# Altium PCB WashrPCBV1.PcbDoc
Units mm, origin at the board's own origin, x right, y up, seen from the top; angles counter-clockwise.
Board outline 82 x 52 mm, 2 copper layers (Top Layer, Bottom Layer); 37 components, 24 nets, 138 pads, 25 vias.
Unrouted connection lines stored in the file: 2.
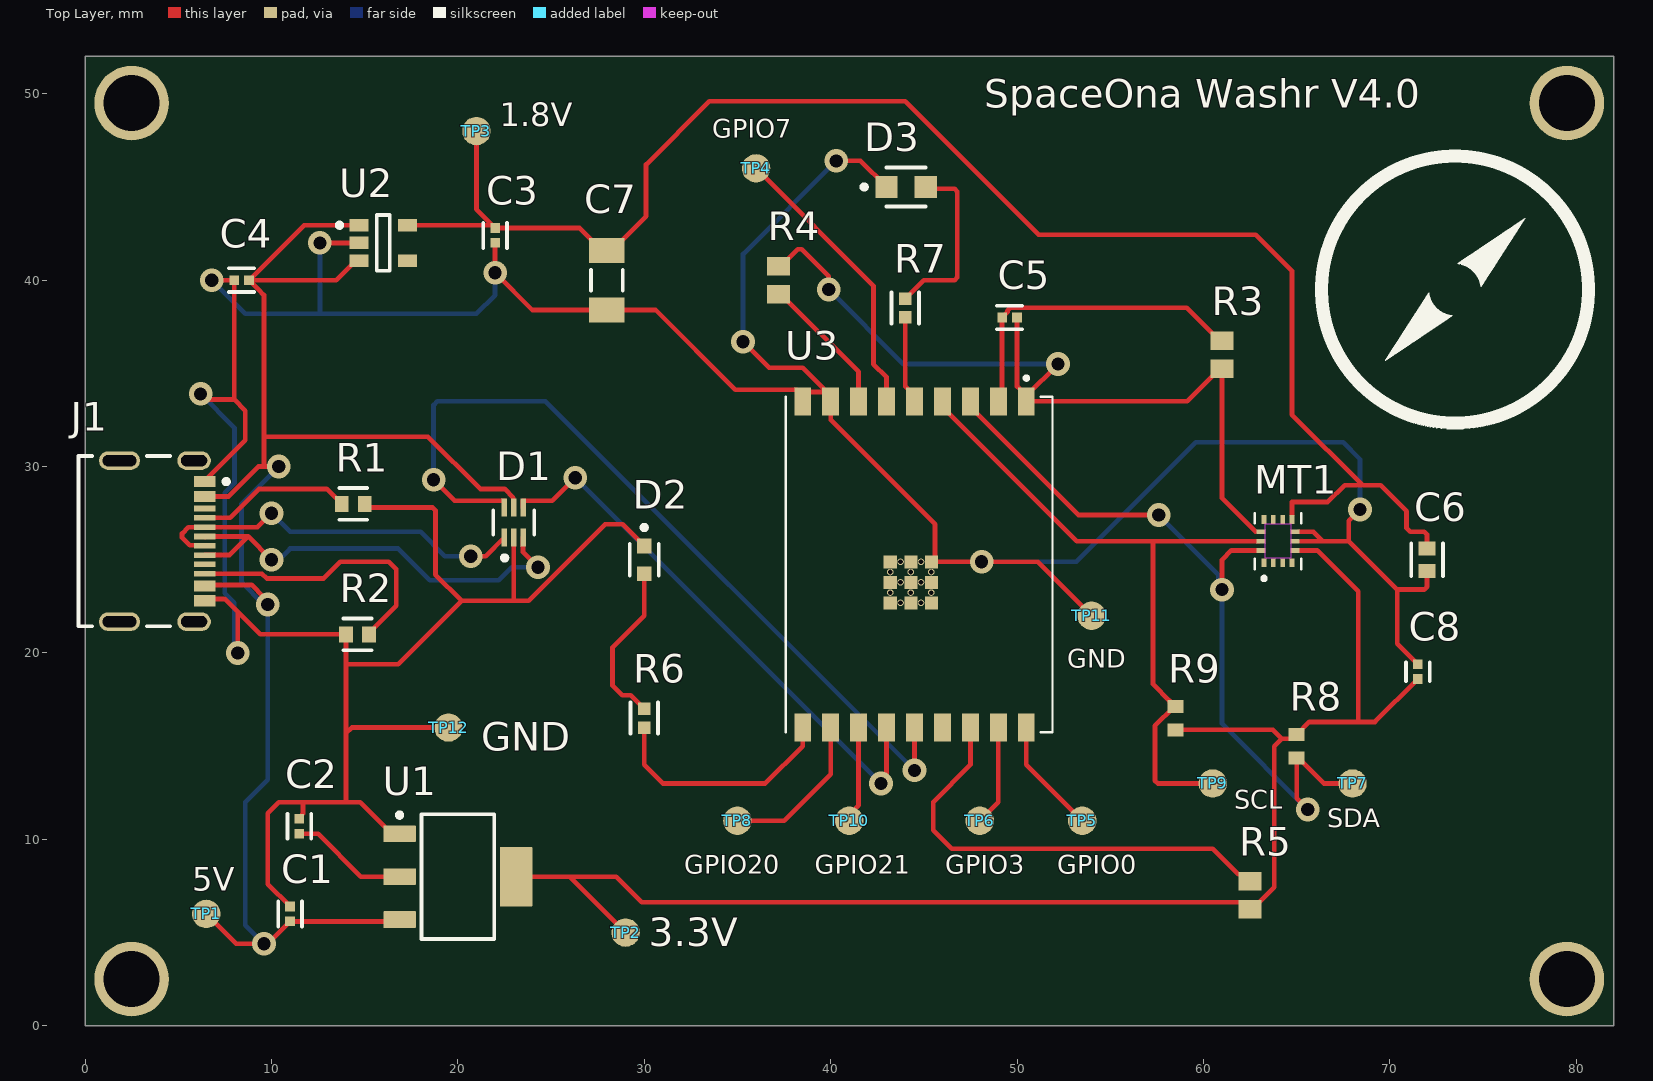
[diagram p0: Top Layer view]
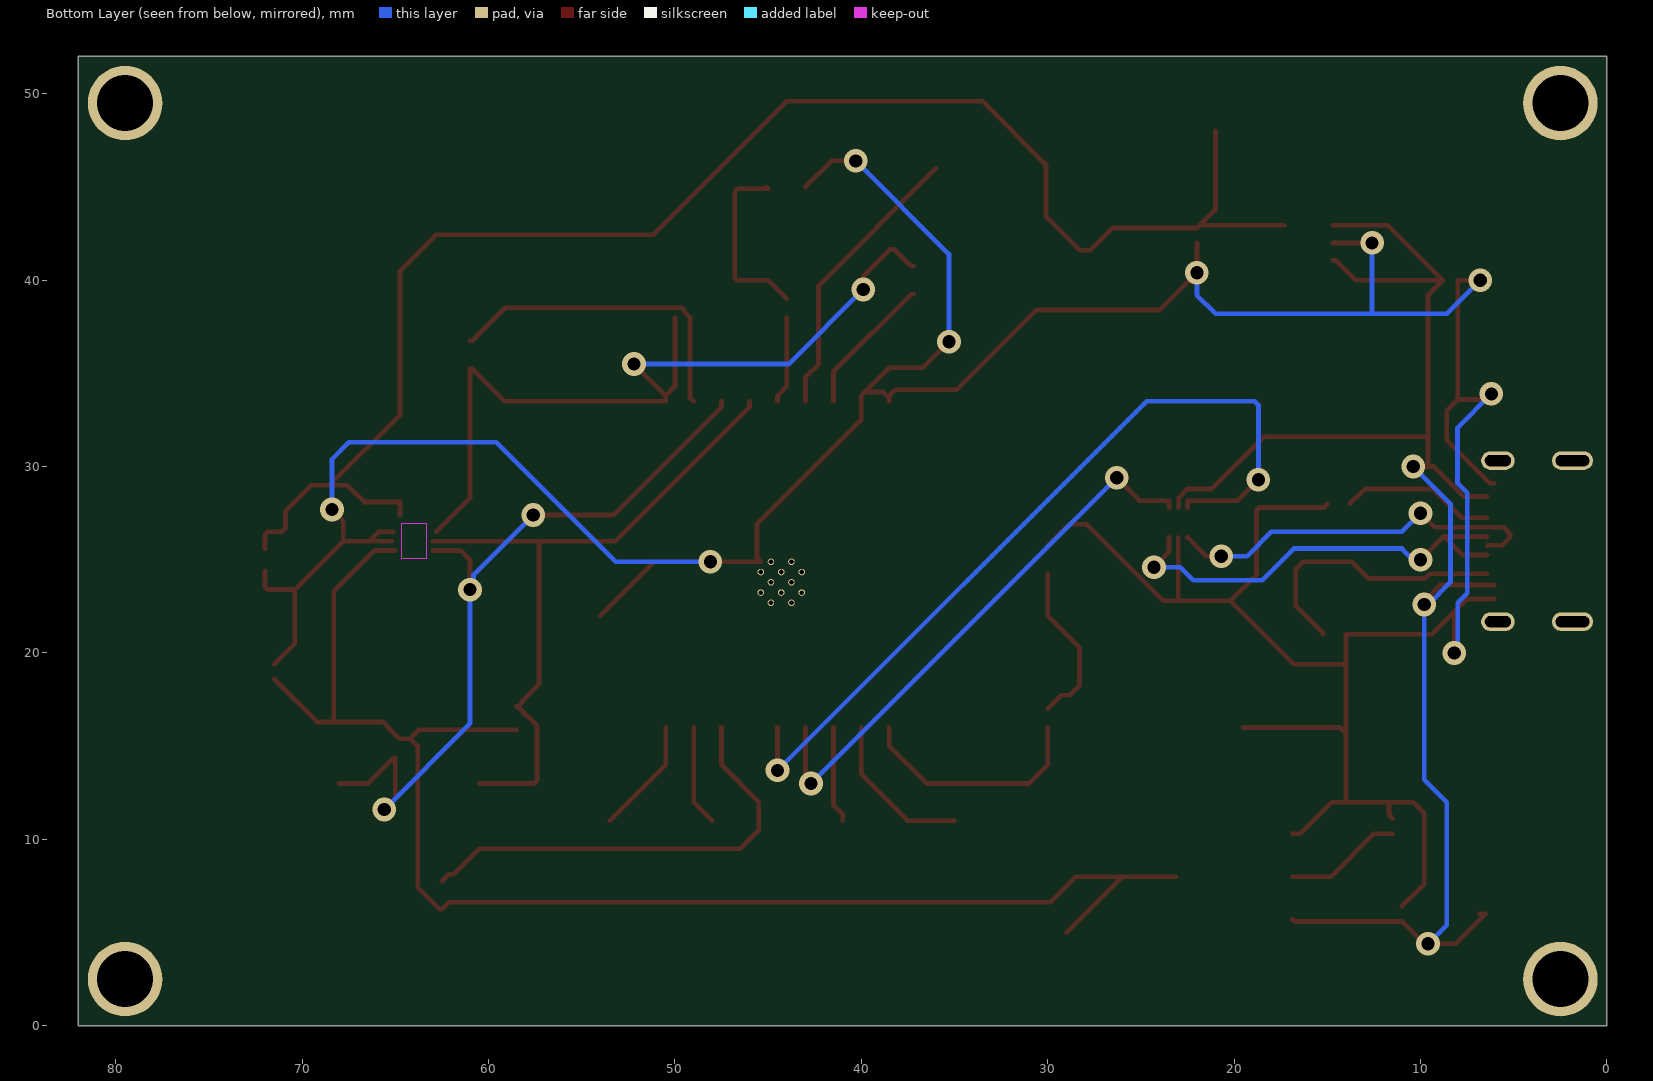
[diagram p1: Bottom Layer view, seen from below]
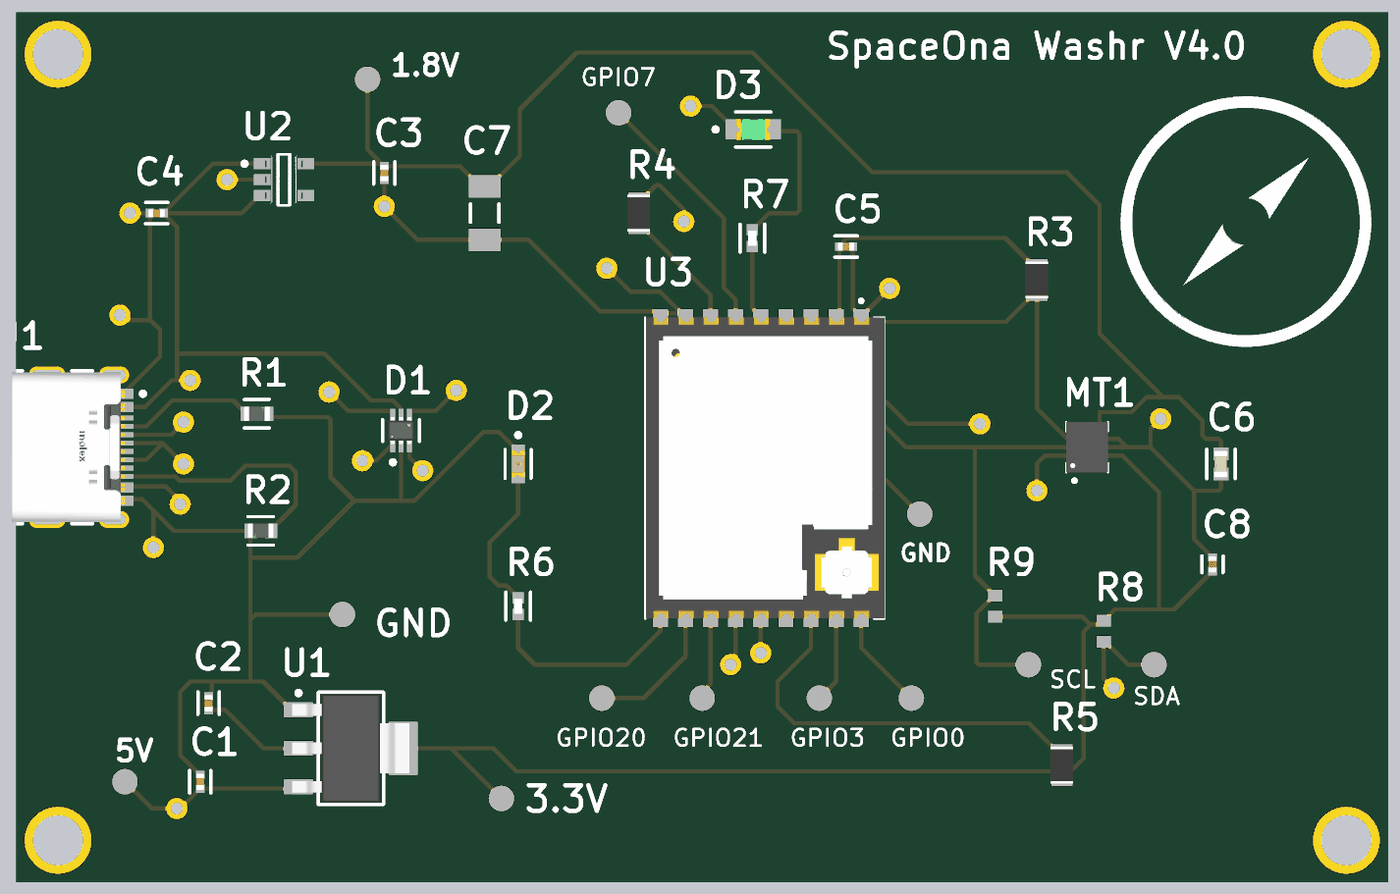
[diagram p2: 3D render of the assembled board from above, using the file's embedded part models]

## Layer stack, top to bottom
Top Solder: solder mask 0.0102, Solder Resist, Dk 3.5
Top Layer: signal copper 0.0356
Dielectric 1: dielectric 0.32, FR-4, Dk 4.8
Bottom Layer: signal copper 0.0356
Bottom Solder: solder mask 0.0102, Solder Resist, Dk 3.5

## Board outline
0,52 82,52 82,0 0,0

## Design rules (kind name [scope] priority, off if disabled: settings)
Clearance [All] p1: gap=0.127 ignorepadtopadclearanceinfootprint=FALSE
HoleSize [All] p1: absolutevalues=TRUE maxlimit=100 minlimit=1 maxpercent=80.000 minpercent=20.000
PolygonConnect [All] p1: connectstyle=Relief reliefconductorwidth=0.254 reliefentries=4 polygonreliefangle="90 Angle" airgapwidth=0.254
RoutingVias [All] p1: holewidth=0.4 width=0.6 viastyle="Through Hole" minholewidth=0.3 minwidth=0.5 maxholewidth=0.4 maxwidth=0.6
SolderMaskExpansion [All] p1: expansion=0.04 istentingtop=FALSE
Width [All] p1: maxlimit=0.254 minlimit=0.127 preferedwidth=0.254
29 further rules are at their usual default settings.

## Components (designator, comment, footprint, x,y, rotation, side; value= is the part's Value field where it differs from the comment)
C1 "C0402C105K8PACTU" FP-C0402C105K8PACTU-MFG 11,6 r90 top
C2 "C0402C105K8PACTU" FP-C0402C105K8PACTU-MFG 11.5,10.7 r90 top
C3 "C0402C105K8PACTU" FP-C0402C105K8PACTU-MFG 22,42.4 r270 top
C4 "C0402C105K8PACTU" FP-C0402C105K8PACTU-MFG 8.4,40 r180 top
C5 "C0402C105K8PACTU" FP-C0402C105K8PACTU-MFG 49.6,38 r180 top
C6 "C0603C104J5RACTU" FP-C0603C-CF-MFG 72,25 r90 top value="0.10 μF"
C7 "CAP 2.2uF 10V 1206(3216)" CAPC1206(3216)110_M 28,40 r90 top value=2.2uF
C8 "C0402C103J3RACTU" FP-C0402-BB-MFG 71.5,19 r90 top value="10,000 pF"
D1 "USBLC6-2P6" FP-SOT-666-MFG 23,27 r90 top
D2 "LTST-C191KRKT" FP-LTST-C191KRKT-MFG 30,25 r270 top
D3 "LTST-C171GKT" FP-LTST-C171GKT-MFG 44.05,45 r0 top
J1 "217179-0001" FP-2171790001-MFG 3,26 r270 top locked
MT1 "ICM-42670-P" XDCR_ICM-42670-P 64,26 r90 top
R1 "CRCW06035K10FKEA" FP-CRCW0603-e3-IPC_C 14.385,28 r0 top
R2 "CRCW06035K10FKEA" FP-CRCW0603-e3-IPC_C 14.615,21 r180 top
R3 "ERA-6AEB103V" RESC2013X60X40LL20T25_A 61,36 r90 top
R4 "ERA-6AEB103V" RESC2013X60X40LL20T25_A 37.2,40 r90 top
R5 "ERA-6AEB103V" RESC2013X60X40LL20T25_A 62.5,7 r270 top
R6 "CRCW040282R0JNED" FP-CRCW0402-e3-IPC_A 30,16.502 r270 top
R7 "CRCW040282R0JNED" FP-CRCW0402-e3-IPC_A 44,38.502 r270 top
R8 "ERJ-3GEYJ472V" RESC1608X55X30LL15T15 65,15 r90 top
R9 "ERJ-3GEYJ472V" RESC1608X55X30LL15T15 58.5,16.5 r270 top
TP1 "Testpin" PCBComponent_1 6.5,6 r90 top
TP2 "Testpin" PCBComponent_1 29,5 r90 top
TP3 "Testpin" PCBComponent_1 21,48 r90 top
TP4 "Testpin" PCBComponent_1 36,46 r90 top
TP5 "Testpin" PCBComponent_1 53.5,11 r90 top
TP6 "Testpin" PCBComponent_1 48,11 r90 top
TP7 "Testpin" PCBComponent_1 68,13 r90 top
TP8 "Testpin" PCBComponent_1 35,11 r90 top
TP9 "Testpin" PCBComponent_1 60.5,13 r90 top
TP10 "Testpin" PCBComponent_1 41,11 r90 top
TP11 "Testpin" PCBComponent_1 54,22 r90 top
TP12 "Testpin" PCBComponent_1 19.5,16 r90 top
U1 "TLV1117LV33DCYR" DCY0004A_N 20,8 r0 top locked
U2 "MIC5504-1.8YM5-TR" FP-SOT23-5LD-PL-1-MFG 16,42 r0 top
U3 "ESP32-C3-WROOM-02U-N4" XCVR_ESP32-C3-WROOM-02U-N4 44.75,24.75 r270 top

## Footprints (in the part's own frame and the unit in brackets; to place one, negate y for a bottom-side part, rotate by r counter-clockwise, add the part's x,y. Pads: shape width x height; smd on the part's side, far side on the other; paste and mask are expansions set on the pad)
CAPC1206(3216)110_M [mm] "Chip Capacitor, Body 3.2x1.6mm, Height 1.1mm, IPC Low Density"
  rect 1.35x1.9 smd: 1(-1.6,0) 2(1.6,0)
  silkscreen extent -0.55,-0.85 0.55,0.85, body extent -1.7,-0.9 1.7,0.9, height 1.1
DCY0004A_N [mm] "SOT223, 4-Leads, Body 6.7x3.7mm, Pitch 2.3mm, IPC Medium Density"
  rrect11% 1.75x0.9 smd: 1(-3.125,2.3) 2(-3.125,0) 3(-3.125,-2.3)
  rrect6% 1.75x3.2 smd: 4(3.125,0)
  silkscreen extent -3.25,-3.35 1.95,3.42, body extent -3.5,-3.25 3.5,3.25, height 1.62
FP-2171790001-MFG [mm]
  rrect100% 1x1.8 hole 1.4 slot 0.6 at 0 deg paste-2539.97 mask+0: 1(-4.32,2.85) 2(4.32,2.85)
  rrect100% 1x2.2 hole 1.8 slot 0.6 at 0 deg paste-2539.97 mask+0: 3(-4.32,-1.15) 4(4.32,-1.15)
  rect 0.6x1.15 smd paste+0 mask+0: A1-B12(-3.2,3.425) A4-B9(-2.4,3.425) B1-A12(3.2,3.425) B4-A9(2.4,3.425)
  rect 0.3x1.15 smd paste+0 mask+0: A5(-1.25,3.425) A6(-0.25,3.425) A7(0.25,3.425) A8(1.25,3.425) B5(1.75,3.425) B6(0.75,3.425) B7(-0.75,3.425) B8(-1.75,3.425)
  silkscreen extent -4.57,-3.35 4.57,4.7, body extent -4.92,-3.45 4.92,4.1, height 0.25
FP-C0402-BB-MFG [mm]
  rect 0.52x0.52 smd paste+0 mask+0: 1(-0.4,0) 2(0.4,0)
  silkscreen extent -0.5,-0.64 0.5,0.64, body extent -0.8,-0.4 0.8,0.4, height 0.25
FP-C0402C105K8PACTU-MFG [mm]
  rect 0.52x0.52 smd paste+0 mask+0: 1(-0.4,0) 2(0.4,0)
  silkscreen extent -0.67,-0.64 0.67,0.64, body extent -0.8,-0.4 0.8,0.4, height 0.25
FP-C0603C-CF-MFG [mm]
  rect 0.75x0.9 smd paste+0 mask+0: 1(-0.6,0) 2(0.6,0)
  silkscreen extent -0.87,-0.85 0.88,0.85, body extent -1.2,-0.6 1.2,0.6, height 0.25
FP-CRCW0402-e3-IPC_A [mm]
  rect 0.668x0.672 smd paste+0 mask+0: 1(-0.502,0) 2(0.502,0)
  silkscreen extent -0.84,-0.74 0.84,0.74, body extent -1.04,-0.54 1.04,0.54, height 0.25
FP-CRCW0603-e3-IPC_C [mm]
  rect 0.735x0.862 smd paste+0 mask+0: 1(-0.615,0) 2(0.615,0)
  silkscreen extent -0.75,-0.85 0.75,0.85, body extent -1.08,-0.58 1.08,0.58, height 0.25
FP-LTST-C171GKT-MFG [mm]
  rect 1.2x1.2 smd paste+0 mask+0: 1(-1.05,0) 2(1.05,0)
  silkscreen extent -2.37,-1.05 1.05,1.05, body extent -1.75,-0.77 1.75,0.77, height 0.25
FP-LTST-C191KRKT-MFG [mm]
  rect 0.8x0.8 smd paste+0 mask+0: 1(-0.75,0) 2(0.75,0)
  silkscreen extent -1.86,-0.78 0.86,0.78, body extent -1.25,-0.55 1.25,0.55, height 0.25
FP-SOT23-5LD-PL-1-MFG [mm]
  rect 1x0.66 smd paste+0 mask+0: 1(-1.3,0.95) 2(-1.3,0) 3(-1.3,-0.95) 4(1.3,-0.95) 5(1.3,0.95)
  silkscreen extent -2.47,-1.5 0.35,1.5, body extent -1.9,-1.6 1.9,1.6, height 0.25
FP-SOT-666-MFG [mm]
  rect 0.99x0.3 smd paste+0 mask+0: 1(-0.805,0.5) 2(-0.805,0) 3(-0.805,-0.5) 4(0.805,-0.5) 5(0.805,0) 6(0.805,0.5)
  silkscreen extent -2.02,-1.1 0.65,1.1, body extent -1.4,-0.95 1.4,0.95, height 0.25
PCBComponent_1 [mil]
  round 60 smd: 1(0,0)
RESC1608X55X30LL15T15 [mm] "Chip Resistor, 2-Leads, Body 1.60x0.80mm, IPC High Density"
  rect 0.7x0.85 smd: 1(-0.625,0) 2(0.625,0)
  body extent -0.87,-0.48 0.87,0.48, height 0.55
RESC2013X60X40LL20T25_A [mm] "Chip Resistor, 2-Leads, Body 2.20x1.35mm, IPC High Density"
  rect 1x1.25 smd: 1(-0.75,0) 2(0.75,0)
  body extent -1.1,-0.67 1.1,0.67, height 0.6
XCVR_ESP32-C3-WROOM-02U-N4 [mm]
  rect 1.5x0.9 smd: 1(-8.75,5.75) 2(-8.75,4.25) 3(-8.75,2.75) 4(-8.75,1.25) 5(-8.75,-0.25) 6(-8.75,-1.75) 7(-8.75,-3.25) 8(-8.75,-4.75) 9(-8.75,-6.25) 10(8.75,-6.25) 11(8.75,-4.75) 12(8.75,-3.25) 13(8.75,-1.75) 14(8.75,-0.25) 15(8.75,1.25) 16(8.75,2.75) 17(8.75,4.25) 18(8.75,5.75)
  rect 0.7x0.7 smd: 19_1(-0.14,0.65) 19_2(0.96,0.65) 19_3(2.06,0.65) 19_4(-0.14,-0.45) 19_5(0.96,-0.45) 19_6(2.06,-0.45) 19_7(-0.14,-1.55) 19_8(0.96,-1.55) 19_9(2.06,-1.55)
  round 0.35 hole 0.25 mask+0: 20_1(0.41,0.65) 20_2(1.51,0.65) 20_3(-0.14,0.1) 20_4(0.96,0.1) 20_5(2.06,0.1) 20_6(0.41,-0.45) 20_7(1.51,-0.45) 20_8(-0.14,-1) 20_9(0.96,-1) 20_10(2.06,-1) 20_11(0.41,-1.55) 20_12(1.51,-1.55)
  silkscreen extent -10.1,-7.15 9,7.15, body extent -9.02,-7.11 8.98,7.19, height 3.2
XDCR_ICM-42670-P [mm]
  rect 0.475x0.25 smd paste-1 mask+0.05: 1(-1.162,0.75) 2(-1.162,0.25) 3(-1.162,-0.25) 4(-1.162,-0.75) 8(1.162,-0.75) 9(1.162,-0.25) 10(1.162,0.25) 11(1.162,0.75)
  rect 0.25x0.475 smd paste-1 mask+0.05: 5(-0.5,-0.913) 6(0,-0.913) 7(0.5,-0.913) 12(0.5,0.913) 13(0,0.913) 14(-0.5,0.913)
  Keep-Out Layer region: 0.925,-0.675 -0.925,-0.675 -0.925,0.675 0.925,0.675
  silkscreen extent -2.1,-1.25 1.5,1.25, body extent -1.5,-1.25 1.5,1.25, height 0.81

## Part data
C1 C2 C3 C4 C5: library part CMP-2008-02081-2, "CAP CER 1UF 10V X5R 0402", Capacitance=1uF, Case Code (Imperial)=0402, Case Code (Metric)=1005, Dielectric=X5R, Dielectric Material=Ceramic, Max Operating Temperature=85°C, Min Operating Temperature=-55°C, Package Quantity=1, Tolerance=10%, Voltage=10V, Case/Package=0402, Construction=Flat, Contact Plating=Tin, Depth=0.5mm, Dissipation Factor=5%, Height=0.5mm, Lead Free="Lead Free", Length=1mm, Mount="Surface Mount", Number of Pins=2, Packaging="Tape and Reel", Radiation Hardening=No, REACH SVHC="No SVHC", RoHS Compliant=Yes, Series=C, Termination=SMD/SMT, Thickness=0.022inch, Voltage Rating=10V, Voltage Rating (DC)=10V, Width=0.5mm
C6: library part CMP-2006-03056-2, "CAP CER 0.1UF 50V 5% X7R 0603", Capacitance="0.10 μF", Manufacturer=KEMET, Package=C0603C-CF, Temperature="-55°C to +125°C", Temperature Characteristic=X7R, Temperature Coefficient=30ppm/°C, Temperature Range High=+125°C, Temperature Range Low=-55°C, Tolerance=0.05, Voltage Rating="50 V", Automotive=Yes, Automotive Grade="Grade 1", Category=Cap, ComponentLink2Description=Datasheet, ComponentLink2URL=https://api.kemet.com/component-edge/download/datasheet/C0603C100J5GACAUTO.pdf, Device Class L1="Passive Components", Device Class L2=Capacitors, Device Class L3="Ceramic Capacitors", Digikey Description="CAP CER 0.1UF 50V 5% X7R 0603", Height=0.87mm, Lead Free=Yes, Manufacturer Part Number=C0603C104J5RACTU, Material=Ceramic, Mouser Description="Multilayer Ceramic Capacitors MLCC - SMD/SMT 50volts 0.1uF X7R 5%", Octopart=https://octopart.com/c0603c104j5ractu-kemet-10440638, RoHS=TRUE
C7: library part CMP-1037-04796-1, "CAP 2.2uF 10V ±10% 1206 (3216 Metric) Thickness 1.1mm SMD", Case-EIA=1206, Case-Metric=3216, Rated Voltage="10 V", Tolerance=Â±10%, Max Thickness="1.1 mm", Technology=SMT
C8: library part CMP-2008-03065-2, "CAP CER 10000PF 25V X7R 0402", Capacitance="10,000 pF", Manufacturer=Kemet, Package=C0402-BB, Temperature="-55°C to +125°C", Temperature Characteristic=X7R, Temperature Coefficient=15%, Temperature Range High=+125°C, Temperature Range Low=-55°C, Tolerance=0.05, Voltage Rating="25 V", Automotive=No, Category=Cap, ComponentLink2Description=Datasheet, ComponentLink2URL=https://content.kemet.com/datasheets/KEM_C1002_X7R_SMD.pdf, Device Class L1="Passive Components", Device Class L2=Capacitors, Device Class L3="Ceramic Capacitors", Digikey Description="CAP CER 10000PF 25V X7R 0402", Height=0.55mm, Ipc Land Pattern Name=CAPC10050X50, Lead Free=Yes, Manufacturer Part Number=C0402C103J3RACTU, Material=Ceramic, Mouser Description="Multilayer Ceramic Capacitors MLCC - SMD/SMT 25volts 10000pF X7R 5%", Octopart=https://octopart.com/c0402c103j3ractu-kemet-135051, RoHS=TRUE
D1: library part CMP-12225-000058-1, "TVS DIODE 5.25V 17V SOT666", Breakdown Voltage=6V, Capacitance=3.5pF, Case/Package=SOT-666, Clamping Voltage=17V, Leakage Current=150nA, Max Operating Temperature=125°C, Min Operating Temperature=-40°C, Operating Supply Voltage=5V, Package Quantity=1, Peak Pulse Current=5A, Power Line Protection=Yes, Test Current=1mA, Contact Plating=Tin, Depth=1.3mm, Direction=Unidirectional, Element Configuration=Dual, ESD Protection=Yes, Height=0.6mm, Lead Free="Lead Free", Length=1.7mm, Max Breakdown Voltage=6V, Max Reverse Leakage Current=150nA, Min Breakdown Voltage=6V, Mount="Surface Mount", Number of Bidirectional Channels=2, Number of Channels=2, Number of Elements=1, Number of Pins=6, Packaging="Tape and Reel", Polarity=Unidirectional, Radiation Hardening=No, REACH SVHC="No SVHC", Reverse Breakdown Voltage=6V, Reverse Standoff Voltage=5V, Termination=SMD/SMT, Width=1.3mm, Working Voltage=5V
D2: library part CMP-2000-05199-2, Case Code (Imperial)=0603, Case Code (Metric)=1608, Color=Red, Current=2A, Forward Current=20mA, Forward Voltage=2V, Lens Color=Colorless, Max Operating Temperature=85°C, Min Operating Temperature=-55°C, Power Dissipation=75mW, Reverse Voltage=5V, Case/Package=0603, Depth=800µm, Dominant Wavelength=631nm, Height=550µm, Illumination Color=Red, Lead Free="Lead Free", Length=1.6mm, Lens Style=Clear, Lens Transparency=Clear, Luminous Intensity=54mcd, Mount="Surface Mount", NexarPartId=549908, Number of Elements=1, Number of LEDs=1, Number of Pins=2, Packaging="Tape and Reel", Power Rating=75mW, Radiation Hardening=No, RoHS=Compliant, Schedule B="8541402000, 8541402000", Test Current=20mA, Viewing Angle=130°, Voltage=2V, Wavelength=639nm, Width=800µm
D3: library part CMP-22017-000007-1, "LED GREEN CLEAR CHIP SMD", Case Code (Imperial)=0805, Case Code (Metric)=2012, Color=Green, Forward Current=30mA, Forward Voltage=2.1V, Lens Color=Colorless, Max Operating Temperature=85°C, Min Operating Temperature=-55°C, Package Quantity=1, Power Dissipation=100mW, Reverse Voltage=5V, Test Current=10mA, Case/Package=0805, Depth=1.25mm, Dominant Wavelength=569nm, Height=0.8mm, Illumination Color=Green, Lead Free="Lead Free", Length=2mm, Lens Style=Diffused, Lens Transparency=Clear, Luminous Intensity=12mcd, Mount="Surface Mount", Number of Elements=1, Number of LEDs=1, Number of Pins=2, Packaging="Tape and Reel", Power Rating=100mW, Radiation Hardening=No, Viewing Angle=130°, Wavelength=585nm, Width=1.25mm
J1: library part CMP-04767-000028-2, "CONN RCP USB2.0 TYP C 24P SMD RA", Current Rating=1.25A, Max Operating Temperature=85°C, Min Operating Temperature=-40°C, Voltage Rating=30V, Contact Material="Gold, Nickel", Gender=Receptacle, Height=3.36mm, NexarPartId=117190526, Number of Contacts=16, USB Standard="USB 2.0"
MT1: Package=None, Supplier Part Number 1=410-ICM-42670-P, Availability=Unavailable, MP=ICM-42670-P, Price=None, Supplier 1=Mouser
R1 R2: library part CMP-1012-00590-3, "RES Thick Film, 5.1kΩ, 1%, 0.1W, 100ppm/°C, 0603", Case Code (Imperial)=0603, Case Code (Metric)=1608, Max Operating Temperature=155°C, Min Operating Temperature=-55°C, Package Quantity=5000, Power Rating=100mW, Resistance=5.1kR, Temperature Coefficient=100ppm/°C, Tolerance=1%, Voltage Rating=75V, Case/Package=0603, Composition="Thick Film", Contact Plating=Tin, Depth=0.85mm, Height=0.45mm, Lead Free="Lead Free", Length=1.55mm, Military Standard=Not, Mount="Surface Mount", Packaging="Tape and Reel", Radiation Hardening=No, Termination=SMD/SMT, Voltage Rating (DC)=75V, Weight=7.1E-05oz, Width=0.85mm
R3 R4 R5: library part CMP-2001-00582-2, "Metal Film Chip Resistor, High Reliability Type, 0.125 W, +/- 0.1%, -55 to 155 degC, 0805 (2012 Metric), RoHS, Tape and Reel", Case Code - in=0805, Case Code - mm=2012, Manufacturer=Panasonic, Operating Temperature Range=-55Cto+155C, Package / Case=0805(2012metric), Package Description="2-Pin Surface Mount Device, Body 2 x 1.25 mm", Power Rating=125mW(1/8W), Resistance=10kOhms, Temperature Coefficient=25PPM/C, Tolerance=0.1%, Voltage Rating=100V, Brand=Panasonic, Datasheet URL=https://industrial.panasonic.com/cdbs/www-data/pdf/RDM0000/AOA0000C307.pdf, Datasheet Version=02/2016, Factory Pack Quantity=5000, Height=0.5mm, Length=2mm, Manufacturer URL=http://www.panasonic.com/, Mounting Technology=SurfaceMount, Package Reference=0805, Packaging=Reel, Product=ThinFilmResistorsSMD, Product Category=ThinFilmResistors-SMD, RoHS=Details, Series=ERA-6A, Termination Style=SMD/SMT, Type=MetalFilmChipResistors, Width=1.25mm
R6 R7: library part CMP-2002-00239-2, "RES Thick Film, 82Ω, 5%, 0.063W, 200ppm/°C, 0402", Case Code (Imperial)=0402, Case Code (Metric)=1005, Max Operating Temperature=155°C, Max Power Dissipation=63mW, Min Operating Temperature=-55°C, Package Quantity=1, Resistance=82R, Temperature Coefficient=200ppm/°C, Tolerance=5%, Voltage Rating=50V, Case/Package=0402, Composition="Thick Film", Contact Plating=Tin, Depth=0.5mm, Features="Automotive AEC-Q200", Height=0.016inch, Lead Free="Lead Free", Length=1mm, Military Standard=Not, Number of Pins=2, Number of Terminations=2, Packaging="Tape and Reel", Power Rating=63mW, Radiation Hardening=No, Termination=SMD/SMT, Voltage Rating (DC)=50V, Weight=2.3E-05oz, Width=0.5mm
R8 R9: library part CMP-2000-00796-1, Manufacturer=Panasonic, Part Number=ERJ-3GEYJ472V
TP1 TP2 TP3 TP4 TP5 TP6 TP7 TP8 TP9 TP10 TP11 TP12: library part Testpin1
U1: library part CMP-0395-00503-2, "Single Output LDO, 1 A, Fixed 3.3 V Output, 2 to 5.5 V Input, 4-pin SOT-223 (DCY), -40 to 125 degC, Green (RoHS & no Sb/Br)", Manufacturer="Texas Instruments", Accuracy(%)=2, Code_JEDEC=TO-261, ComponentLink1Description="Manufacturer URL", ComponentLink1URL=http://www.ti.com/, ComponentLink2Description=Datasheet, ComponentLink2URL=http://www.ti.com/general/docs/lit/getliterature.tsp?genericPartNumber=TLV1117LV33&fileType=pdf, ComponentLink3Description="Package Specification", ComponentLink3URL=http://www.ti.com/litv/pdf/mpds094a, DatasheetVersion=SBVS160A, Eco-Plan="Green (RoHS & no Sb/Br)", Fixed Output Options(V)=3.3, Iout(Max)(A)=1, Iq(Typ)(mA)=0.05, Mounting Technology="Surface Mount", PackageDescription="4-Pin Plastic Small Outline, Body 3.5 x 6.5 mm, Pitch 2.3 mm", PackageReference=DCY0004A, PackageVersion=4202506/B, PartNumber=TLV1117LV33DCYR, SubFamily="Single Channel LDO", Vdo(Typ)(mV)=1200, Vin(Max)(V)=5.5, Vin(Min)(V)=2, Vout Adj(Max)(V)=3.3, Vout Adj(Min)(V)=3.3
U2: library part CMP-06324-000021-1, "IC REG LINEAR 1.8V 300MA SOT23-5", Dropout Voltage=160mV, Manufacturer=Microchip, Max Junction Temp=+125°C, Max Supply Voltage=5.5V, Min Supply Voltage=2.5V, Nominal Supply Current=38-42uA, Output Current=300mA, Output Voltage=1.8V, Package=SOT23-5LD-PL-1, Temperature="-40°C to +125°C", Temperature Range Low=-40°C, Accuracy Percentage=2%, Automotive=No, Category=IC, ComponentLink2Description=Datasheet, ComponentLink2URL=http://ww1.microchip.com/downloads/en/DeviceDoc/MIC5501-02-03-04-300mA-Single-Output-LDO-in-Small-Packages-DS20006006B.pdf, Device Class L1="Integrated Circuits (ICs)", Device Class L2="Power Management ICs", Device Class L3="Voltage Regulators - Linear", Digikey Description="IC REG LINEAR 1.8V 300MA SOT23-5", Height=1.45mm, Lead Free=Yes, Manufacturer Part Number=MIC5504-1.8YM5-TR, Number Of Outputs=1, Octopart=https://octopart.com/mic5504-1.8ym5-tr-microchip-66803399, Output Type=Fixed, RoHS=TRUE, Standoff Height=0mm, Temperature Range High=+125°C
U3: "Bluetooth, WiFi 802.11b/g/n, Bluetooth v5.0 Transceiver Module 2.4GHz Antenna Not Included, U.FL Surface Mount", Package="SMD-19 Espressif Systems", Check_prices=https://www.snapeda.com/parts/ESP32-C3-WROOM-02U-N4/Espressif+Systems/view-part/?ref=eda, MF="Espressif Systems", MP=ESP32-C3-WROOM-02U-N4, SnapEDA_Link=https://www.snapeda.com/parts/ESP32-C3-WROOM-02U-N4/Espressif+Systems/view-part/?ref=snap

## Free pads (board coordinates)
  round 4 hole 3: 6(2.5,2.5) 6(2.5,49.5) 6(79.5,2.5) 6(79.5,49.5)

## Via types
v1: diameter 1.27, hole 0.711, Top Layer to Bottom Layer, 25 vias

## Nets (pads, with @x,y where several pads share a name; then routed paths per layer and width w, separated by ;. In a path a pad name is that pad's centre, name@x,y a point inside that pad or via, vN(x,y) a via of type N, cw(c..) or ccw(c..) an arc to the next point about the centre after c; other vN are vias at no path point)
CC1: J1.A5 R1.1 | length 8.4
  Top Layer w0.254: J1.A5 7.787,27.25 9.337,28.8 12.969,28.8 13.465,28.304 13.529,28.304 13.769,28.064 R1.1
CC2: J1.B5 R2.1 | length 15
  Top Layer w0.254: J1.B5 9.493,24.25 9.743,24 12.8,24 13.7,24.9 16.3,24.9 16.7,24.5 16.7,22.533 15.231,21.064 R2.1
D+: D1.4 U3.13 | length 30
  Top Layer w0.254: D1.4 23.5,28.15 23.523,28.173 25.073,28.173 v1(26.3,29.4) ; v1(42.7,13) 42.7,13.1 43,13.4 U3.13
  Bottom Layer w0.254: v1(26.3,29.4) v1(42.7,13)
D-: D1.6 U3.14 | length 45
  Top Layer w0.254: v1(18.7,29.3) 19.827,28.173 22.477,28.173 22.5,28.15 D1.6 ; v1(44.5,13.7) U3.14
  Bottom Layer w0.254: v1(18.7,29.3) 18.7,33.3 18.9,33.5 24.7,33.5 v1(44.5,13.7)
D_N: D1.1 J1.A7 J1.B7 | length 20.7
  Top Layer w0.254: J1.A7 6.402,25.773 5.627,25.773 5.205,26.195 5.205,26.405 5.55,26.75 J1.B7 9.25,26.75 v1(10,27.5) ; v1(20.694,25.194) 21.499,25.194 D1.1
  Bottom Layer w0.254: v1(10,27.5) 11,26.5 18,26.5 19.306,25.194 v1(20.694,25.194)
D_P: D1.3 J1.A6 J1.B6 | length 23.9
  Top Layer w0.254: J1.B6 7.75,25.25 8.75,26.25 ; J1.A6@6.448,26.227 J1.A6 8.75,26.25 ; v1(10,25) 8.75,26.25 ; D1.3 23.5,25.4 v1(24.3,24.6)
  Bottom Layer w0.254: v1@10.411,25.011 11,25.6 16.8,25.6 18.5,23.9 22.2,23.9 22.9,24.6 v1(24.3,24.6)
GND: C1.2 C2.2 C3.2 C4.2 C6.1 C7.1 C8.2 D1.2 D2.1 D3.1 J1.A1-B12 J1.B1-A12 MT1.6 MT1.7 R1.2 R2.2 TP11.1 TP12.1 U1.1 U2.2 U3.8 U3.9 U3.19_1 | length 233.8
  Top Layer w0.254: J1.B1-A12@6.05,22.9 7.5,22.9 8.2,22.2 ; J1.A1-B12@6.05,29.1 6.29,29.1 8.6,31.41 8.6,33 8,33.6 ; v1(6.2,33.9) 6.5,33.6 8,33.6 ; v1(6.8,40) C4.2 8,33.6 ; v1(8.2,20) 8.2,22.2 ; C1.2 9.8,7.6 9.8,11.4 10.395,11.995 11.693,11.995 ; C2.2 11.633,11.233 11.633,11.322 11.693,11.382 11.693,11.995 ; v1(12.6,42) U2.2 ; R1.2 15.2,27.8 18.651,27.8 18.8,27.651 18.8,24.2 20.2,22.8 ; U1.1 16.45,10.3 14.755,11.995 14,11.995 ; TP12.1 14.303,16 14,15.697 ; C3.2 v1(22,40.4) 24,38.4 C7.1 30.616,38.4 34.893,34.123 38.177,34.123 38.5,33.8 U3.9@38.5,33.677 ; D1.2 23,22.8 ; D2.1 28.85,26.9 27.9,26.9 23.8,22.8 23,22.8 ; v1(35.3,36.7) 36.7,35.3 38.5,35.3 40,33.8 U3.8 40,32.5 45.6,26.9 45.6,25.09 U3.19_1 45.405,24.895 48.095,24.895 v1(48.1,24.9) 51.1,24.9 TP11.1 ; U3.9 U3.9@38.5,33.677 ; U3.8@39.677,34 38.823,34 U3.9@38.5,33.677 ; v1(40.3,46.4) 41.6,46.4 D3.1 ; MT1.7@65.1,26.5 65.9,26.5 66.4,26 ; 65.2,26 66.4,26 ; v1(68.4,27.7) 67.8,27.1 67.8,26 ; C8.2 70.4,20.5 70.4,23.4 ; C6.1 72,23.549 71.851,23.4 70.4,23.4 ; 8.2,22.2 9.4,21 R2.2 14,19.4 ; 11.693,11.995 14,11.995 ; 14,11.995 14,15.697 ; 14,15.697 14,19.4 ; 14,19.4 16.8,19.4 20.2,22.8 ; 20.2,22.8 23,22.8 ; 66.4,26 67.8,26 ; 67.8,26 70.4,23.4
  Bottom Layer w0.254: v1(6.2,33.9) 8.019,32.081 8.019,29.106 7.5,28.587 7.5,23.2 8.01,22.691 8.01,20.19 v1(8.2,20) ; v1(6.8,40) 8.6,38.2 12.6,38.2 ; v1(12.6,42) 12.6,38.2 ; v1(22,40.4) 22,39.2 21,38.2 12.6,38.2 ; v1(35.3,36.7) 35.3,41.4 v1(40.3,46.4) ; v1(48.1,24.9) 48.11,24.89 53.19,24.89 59.6,31.3 67.5,31.3 68.4,30.4 v1(68.4,27.7)
NetC5_2: C5.2 R3.2 U3.2 | length 17.4
  Top Layer w0.254: U3.2 49.2,33.7 C5.2 49.486,38.286 49.486,38.365 49.635,38.514 59.111,38.514 60.875,36.75 R3.2
NetD2_2: D2.2 R6.1 | length 8.9
  Top Layer w0.254: R6.1 29.998,17.004 29.272,17.73 28.819,17.73 28.3,18.249 28.3,20.3 30,22 D2.2
NetD3_2: D3.2 R7.1 | length 9.9
  Top Layer w0.254: R7.1 44.002,39.004 44.998,40 46.651,40 46.8,40.149 46.8,44.751 46.651,44.9 45,44.9 D3.2
NetR4_1: R4.1 U3.7 | length 7.6
  Top Layer w0.254: R4.1 37.325,39.25 41.5,35.075 U3.7
NetR5_1: R5.1 U3.16 | length 24.5
  Top Layer w0.254: U3.16 47.5,14 45.5,12 45.5,10.5 46.5,9.5 60.5,9.5 61.877,8.123 62.127,8.123 R5.1
NetR6_2: R6.2 U3.10 | length 12.7
  Top Layer w0.254: R6.2 30,14 31,13 36.5,13 38.5,15 U3.10
NetR7_2: R7.2 U3.5 | length 4.7
  Top Layer w0.254: R7.2 44,34.3 44.5,33.8 U3.5
NetTP4_1: TP4.1 U3.6 | length 15.4
  Top Layer w0.254: TP4.1 42.3,39.7 42.3,35.5 43,34.8 U3.6
NetTP5_1: TP5.1 U3.18 | length 6.2
  Top Layer w0.254: U3.18 50.5,14 TP5.1
NetTP6_1: TP6.1 U3.17 | length 5.4
  Top Layer w0.254: TP6.1 49,12 U3.17
NetTP8_1: TP8.1 U3.11 | length 8.5
  Top Layer w0.254: TP8.1 37.5,11 40,13.5 U3.11
NetTP10_1: TP10.1 U3.12 | length 5.2
  Top Layer w0.254: TP10.1 41,11.344 41.5,11.844 U3.12
SCL: MT1.13 R9.1 TP9.1 U3.4 | length 37.3
  Top Layer w0.254: U3.4 46,33.2 53.2,26 57.3,26 ; R9.1 R9.1@58.425,17.125 ; TP9.1 57.549,13 57.4,13.149 57.4,16.1 R9.1@58.425,17.125 ; MT1.13@63,26 58.649,26 57.3,26 ; 57.3,26 57.3,18.325 58.202,17.423 58.202,17.348 R9.1@58.425,17.125
SDA: MT1.14 R8.1 TP7.1 U3.3 | length 42
  Top Layer w0.254: U3.3 47.5,33.2 53.3,27.4 v1(57.6,27.4) ; v1(61,23.4) 61,25 61.5,25.5 MT1.14@62.977,25.5 ; v1@65.4,11.8 65,12.2 R8.1 65.075,14.375 66.45,13 TP7.1
  Bottom Layer w0.254: v1(57.6,27.4) 60.806,24.194 60.806,23.594 v1(61,23.4) 61,16.2 v1(65.6,11.6)
V1.8: C3.1 C6.2 C7.2 MT1.8 TP3.1 U2.5 | length 85.9
  Top Layer w0.254: U2.5 C3.1@21.85,42.95 ; TP3.1 21,43.8 C3.1@21.85,42.95 ; 64.75,27.4 64.75,28.1 66.675,28.1 67.575,29 68.538,29 ; C6.2 72,26.351 71.851,26.5 71.1,26.5 70.9,26.7 70.9,27.6 69.5,29 68.538,29 ; C3.1@21.85,42.95 C3.1 26.525,42.8 27.725,41.6 C7.2 28.275,41.6 30.1,43.425 30.1,46.2 33.5,49.6 44,49.6 51.157,42.443 62.807,42.443 64.75,40.5 64.75,32.788 68.538,29
V3.3: C2.1 C5.1 C8.1 MT1.5 MT1.12 R3.1 R4.2 R5.2 R8.2 R9.2 TP2.1 U1.2 U1.4 U3.1 | length 132.3
  Top Layer w0.254: C2.1 12.5,10.3 14.8,8 U1.2 ; U1.4 26,8 ; TP2.1 26,8 ; R4.2 37.325,40.75 38.232,41.657 38.443,41.657 39.9,40.2 v1@39.9,39.7 ; C5.1 50,34.3 U3.1@50.5,33.8 ; v1(52.2,35.5) U3.1@50.5,33.8 ; R9.2 63.729,15.875 64.202,15.402 ; 62.8,26.5 61,28.3 R3.1 60.875,35.25 59.125,33.5 U3.1 U3.1@50.5,33.8 ; MT1.5@65.023,25.5 66.1,25.5 68.3,23.3 68.3,16.3 ; C8.1 69.2,16.3 68.3,16.3 ; 26,8 28.5,8 29.877,6.623 62.127,6.623 R5.2 62.625,6.25 63.8,7.425 63.8,15 64.202,15.402 ; 64.202,15.402 64.777,15.402 R8.2 65.675,16.3 68.3,16.3
  Bottom Layer w0.254: v1(39.9,39.5) 43.9,35.5 v1(52.2,35.5)
Vbus: C1.1 C4.1 D1.5 J1.A4-B9 J1.B4-A9 TP1.1 U1.3 U2.1 U2.3 | length 87.5
  Top Layer w0.254: J1.B4-A9@6.05,23.65 8.95,23.65 v1@9.6,23 ; J1.A4-B9 7.7,28.4 9.3,30 9.6,30 ; TP1.1@6.844,6 TP1.1 8.1,4.4 v1(9.6,4.4) 9.8,4.4 C1.1 16.775,5.6 U1.3 ; v1(10.4,30) 9.6,30 ; U2.3 14.53,41.05 13.48,40 12.8,40 C4.1 ; U2.1 11.75,42.95 C4.1 ; D1.5 22.977,27.828 22.977,28.332 22.509,28.8 21.2,28.8 18.4,31.6 9.6,31.6 ; C4.1 9.292,39.508 9.6,39.2 9.6,31.6 ; 9.6,30 9.6,31.6
  Bottom Layer w0.254: v1(9.6,4.4) 8.6,5.4 8.6,12 9.8,13.2 v1(9.8,22.6) 9.6,22.6 8.4,23.8 8.4,28 v1(10.4,30)
pads on no net: J1.1 J1.2 J1.3 J1.4 J1.A8 J1.B8 MT1.1 MT1.2 MT1.3 MT1.4 MT1.9 MT1.10 MT1.11 U2.4 U3.15 U3.19_2 U3.19_3 U3.19_4 U3.19_5 U3.19_6 U3.19_7 U3.19_8 U3.19_9 U3.20_1 U3.20_2 U3.20_3 U3.20_4 U3.20_5 U3.20_6 U3.20_7 U3.20_8 U3.20_9 U3.20_10 U3.20_11 U3.20_12

## Silkscreen, mask and mechanical layers (free items; w line width, h text height)
Top Overlay:
  drawing of 3 lines, arcs and shapes, not listed
  text "SpaceOna Washr V4.0" at 48.254,49.262 h1.52
  text "1.8V" at 22.254,48.254 h1.25
  text "GPIO7" at 33.65,47.65 h1
  text "GND" at 52.7,19.2 h1
  text "GND" at 21.254,14.754 h1.52
  text "SCL" at 61.65,11.65 h1
  text "SDA" at 66.65,10.65 h1
  text "GPIO20" at 32.15,8.15 h1
  text "GPIO21" at 39.15,8.15 h1
  text "GPIO3" at 46.15,8.15 h1
  text "GPIO0" at 52.15,8.15 h1
  text "5V" at 5.754,7.254 h1.25
  text "3.3V" at 30.254,4.254 h1.52
Mechanical 1:
  lines w0.254: 0.1,0.2 0.2,0.3 ; 81.8,51.8 81.9,51.9 ; 0,0 0,52 82,52 82,0 0,0